# Altium PCB SensorFusion.PcbDoc (part 1 of 2)
Units mil, origin at the board's own origin, x right, y up, seen from the top; angles counter-clockwise.
Board outline 6000 x 4000 mil, 4 copper layers (Component Side, Ground Plane, Power Plane, Solder Side), stack 33.234 mil thick; 136 components, 116 nets, 500 pads, 751 vias.
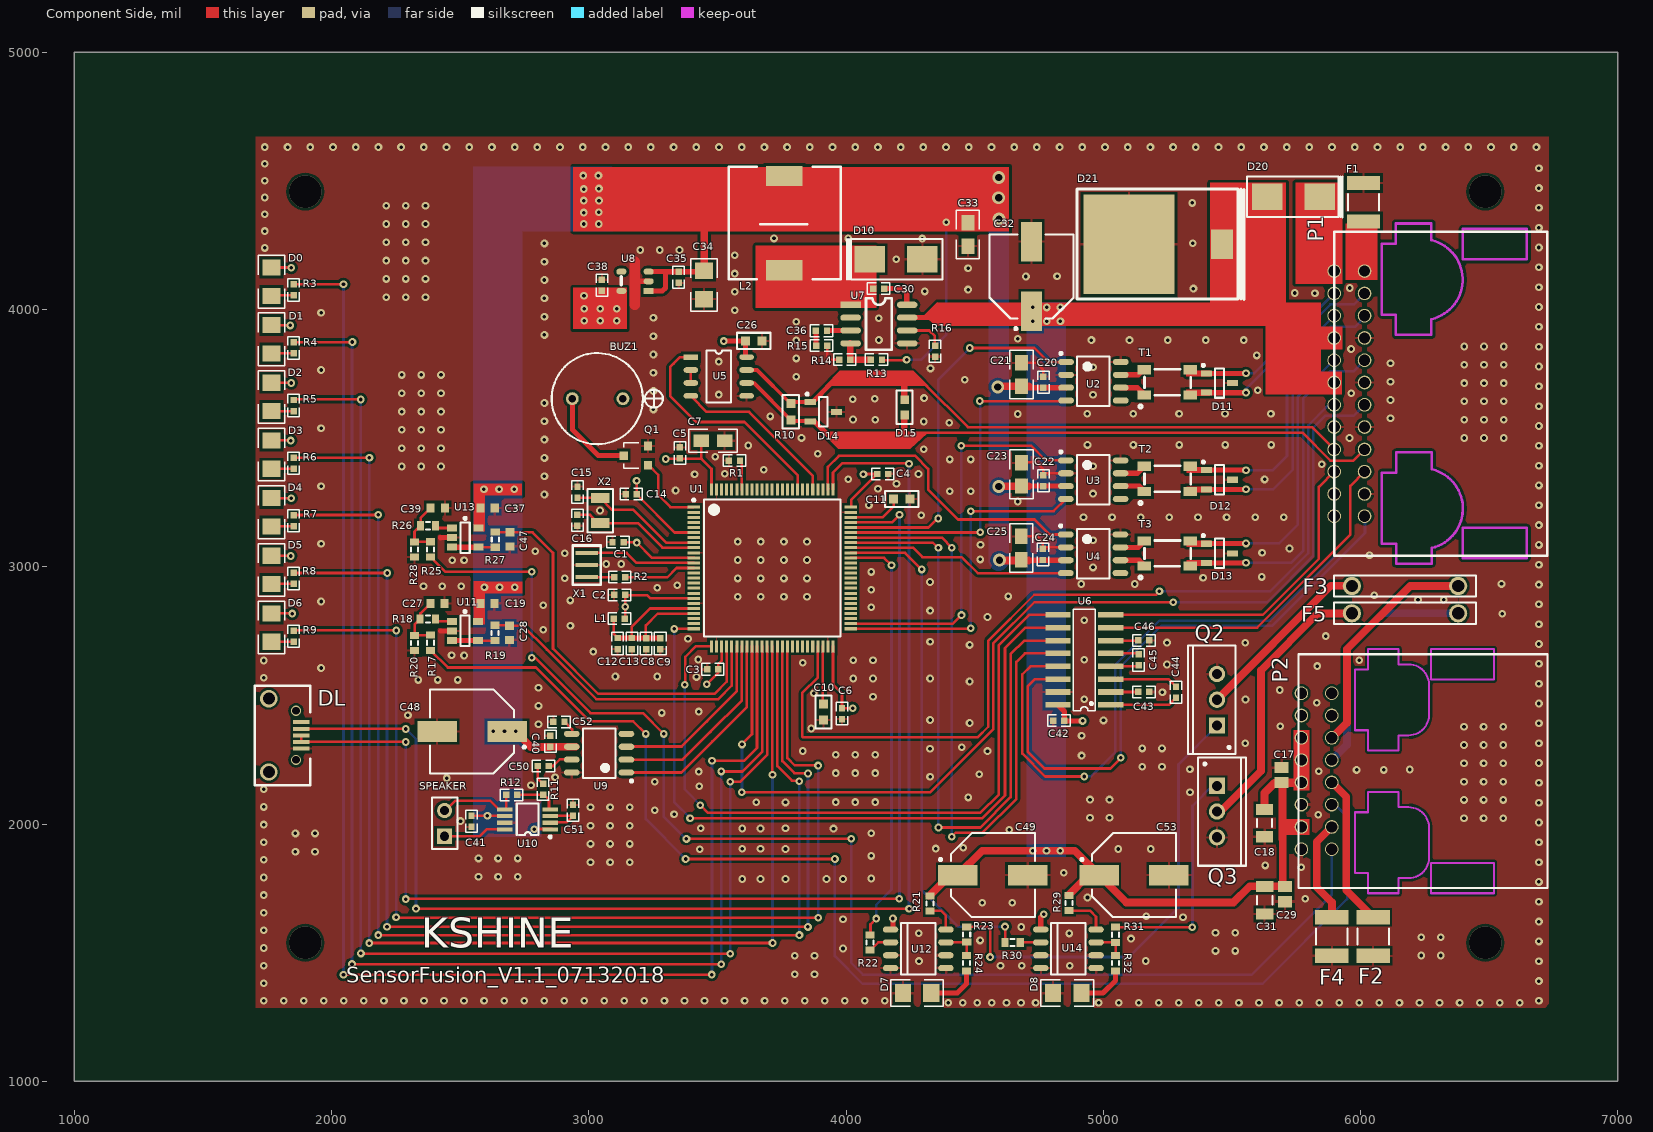
[diagram p0: Component Side view]
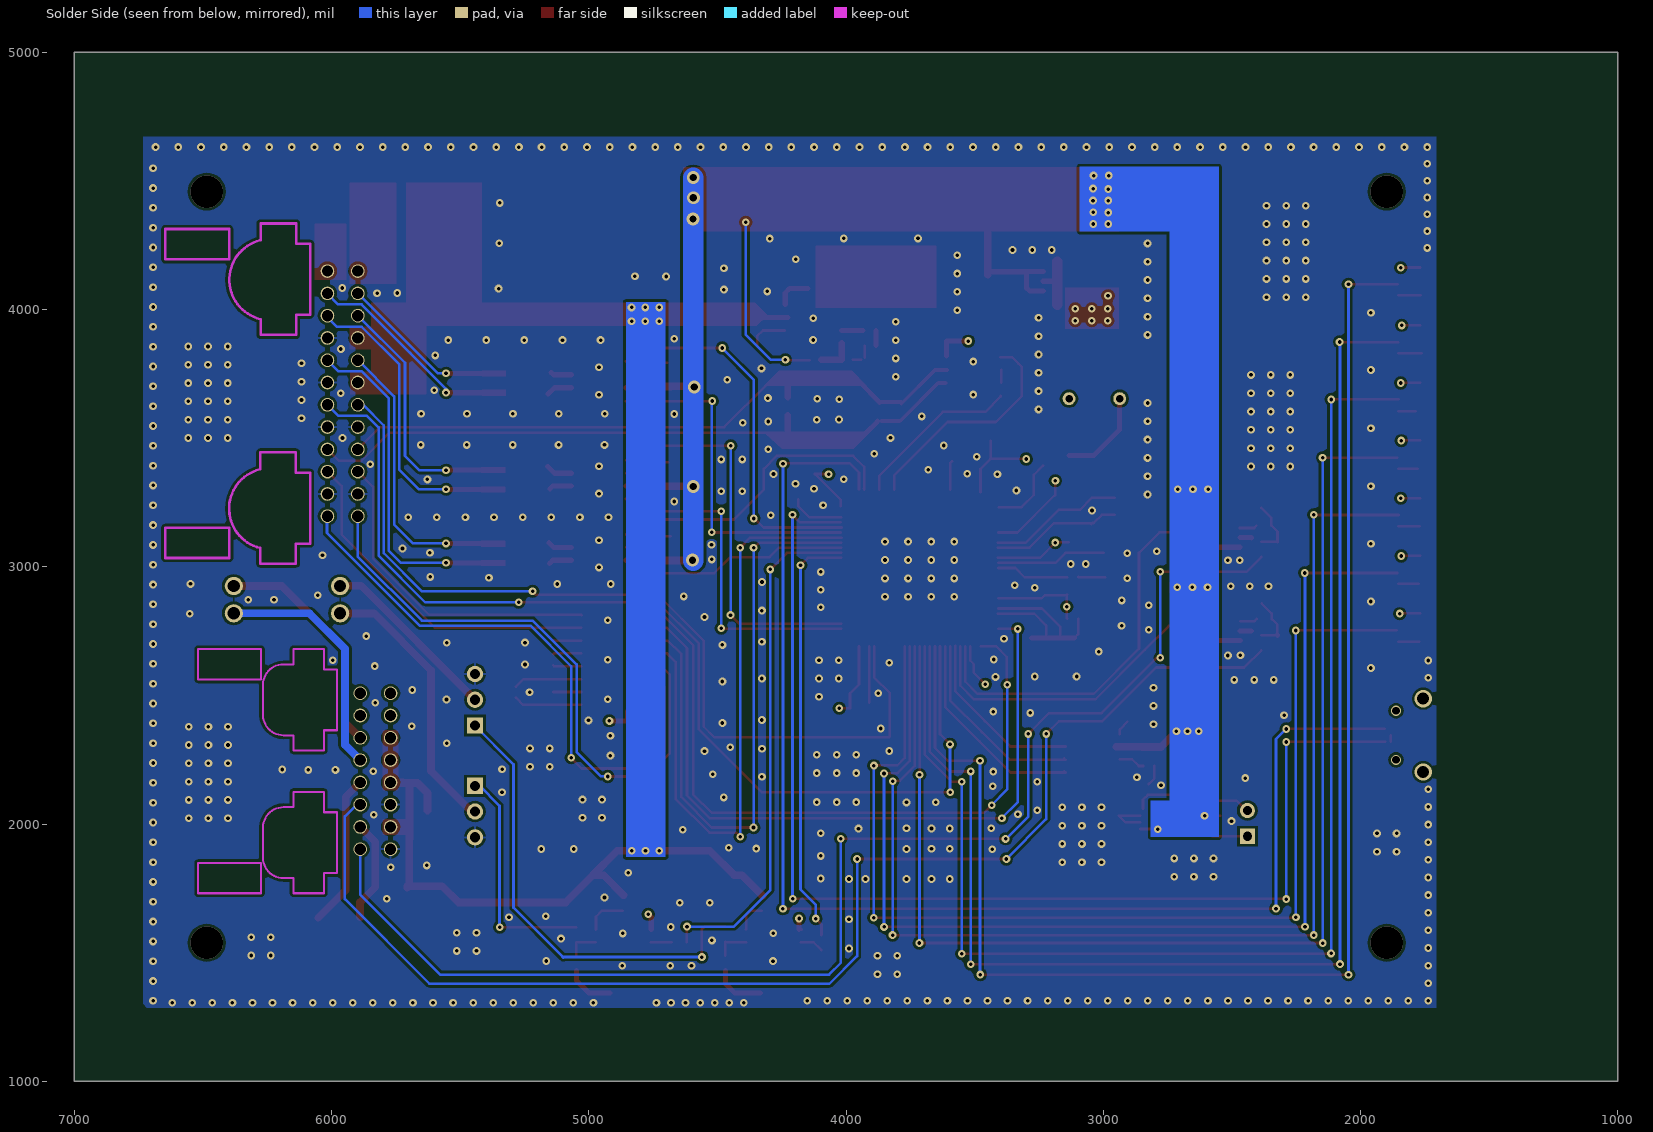
[diagram p1: Solder Side view, seen from below]
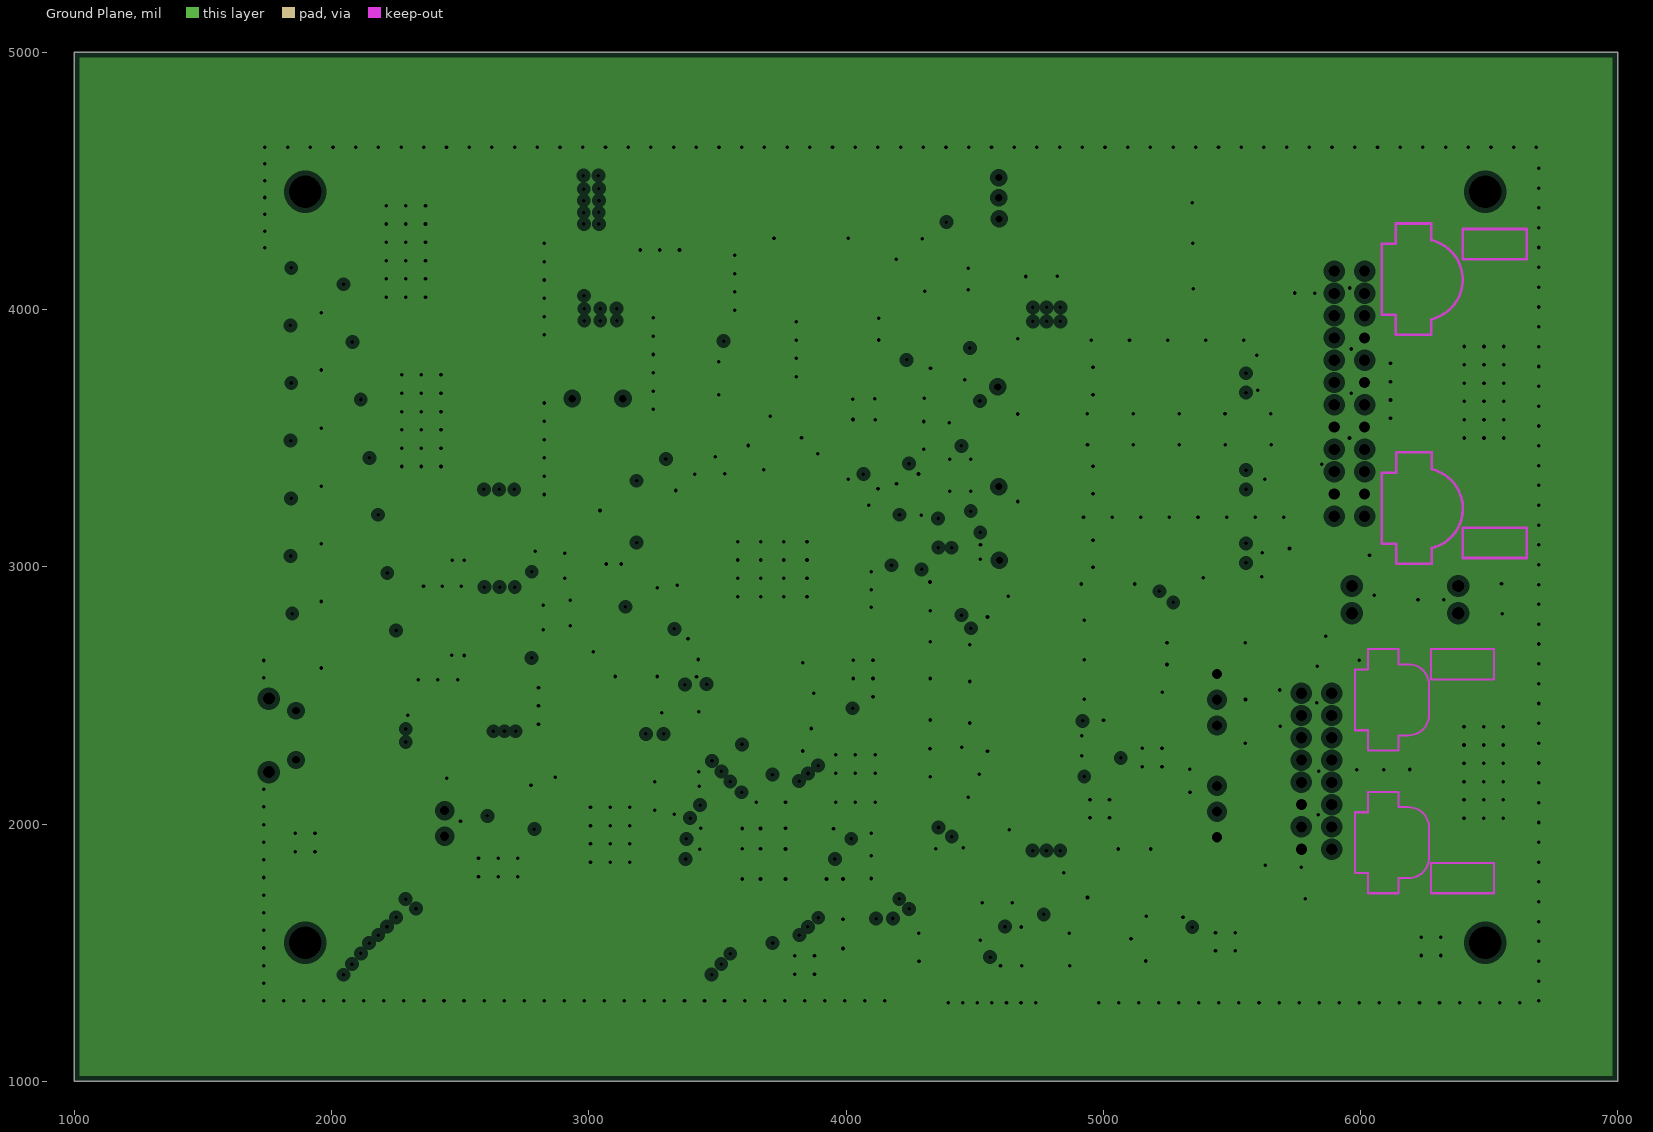
[diagram p2: Ground Plane, clearances drawn from the general rule]
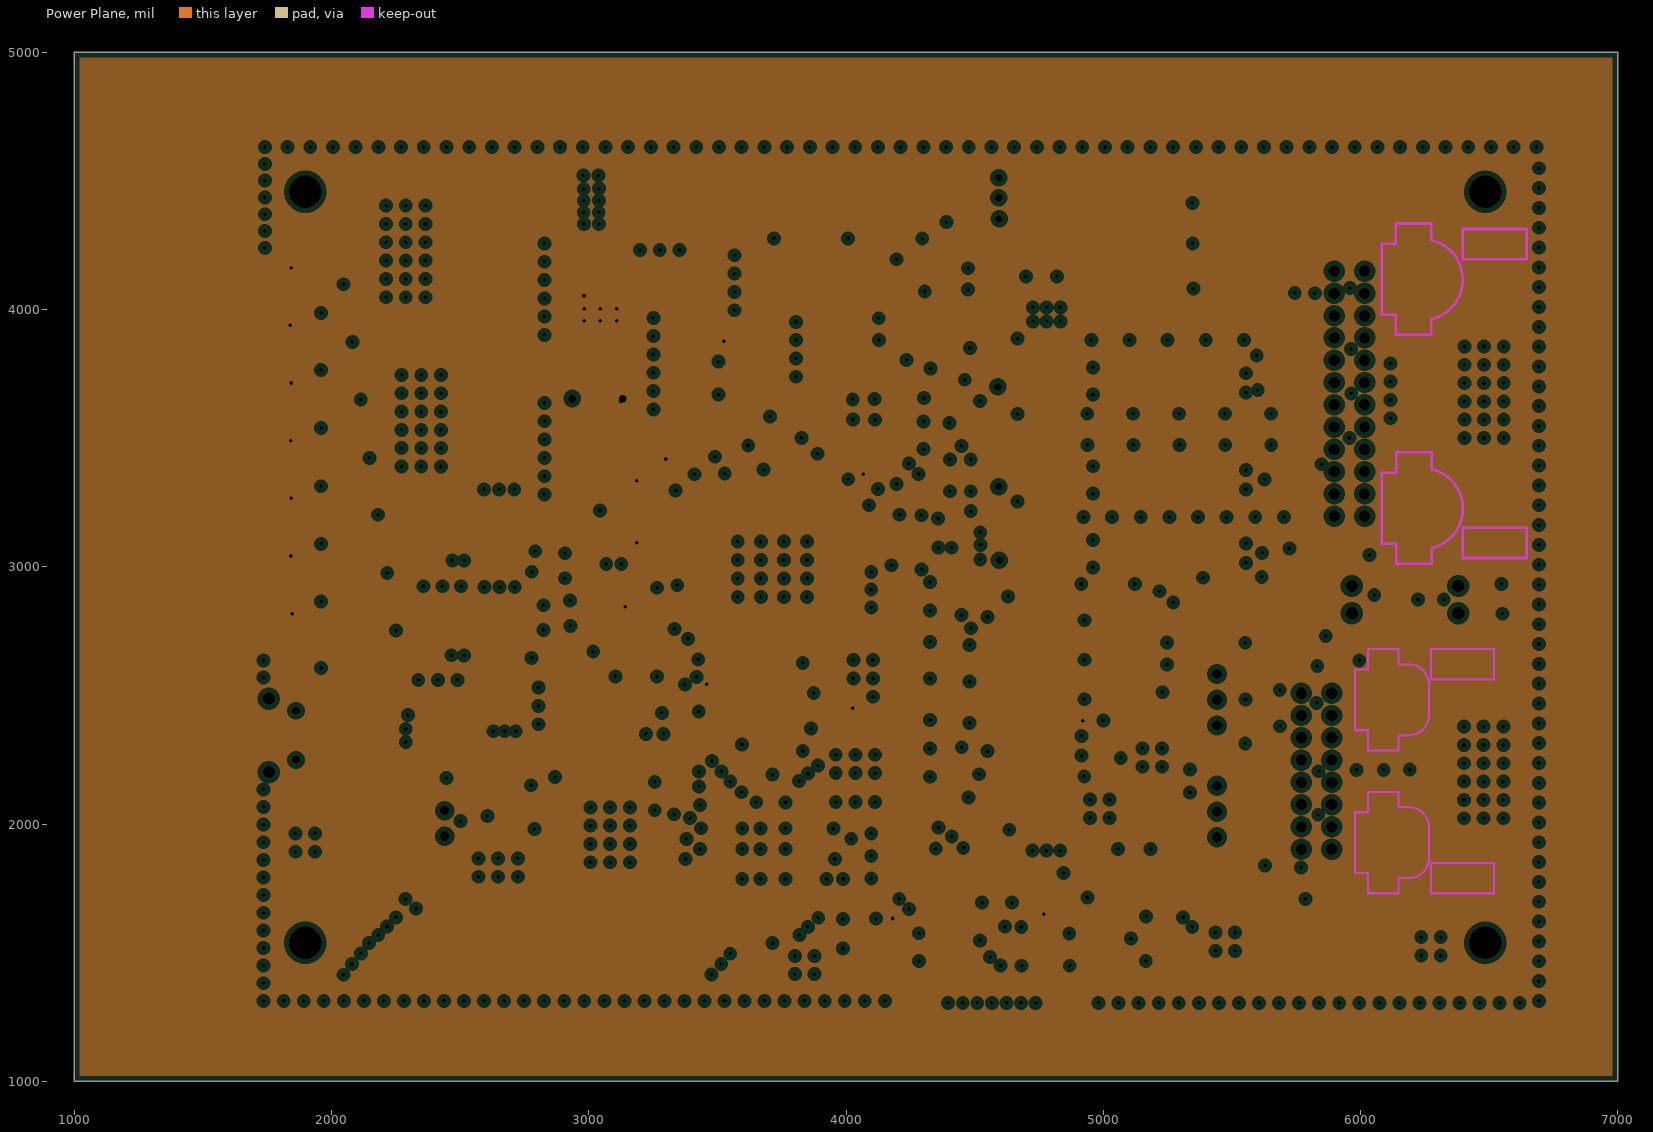
[diagram p3: Power Plane, clearances drawn from the general rule]

## Layer stack, top to bottom
Top Solder: solder mask 0.4, Solder Resist, Dk 3.5
Component Side: signal copper 1.4
Dielectric 1: core 12.6, FR-4, Dk 4.8
Ground Plane: plane copper 1.417, net GND
Dielectric 3: prepreg 5, Dk 4.2
Power Plane: plane copper 1.417, net D3V3
Dielectric 4: core 10, Dk 4.2
Solder Side: signal copper 1.4
Bottom Solder: solder mask 0.4, Solder Resist, Dk 3.5

## Board outline
1000,1000 7000,1000 7000,5000 1000,5000

## Design rules (kind name [scope] priority, off if disabled: settings)
Clearance [All] p1: gap=3
ComponentClearance [All] p1: gap=0 collisioncheckmode=3 verticalgap=0 showdistances=FALSE
HoleSize [All] p1 off: absolutevalues=TRUE maxlimit=100 minlimit=1 maxpercent=80.000 minpercent=20.000
PlaneClearance [All] p1: clearance=20
PlaneConnect [All] p1: planeconnectstyle=Direct reliefexpansion=20 reliefentries=4 reliefconductorwidth=10 reliefairgap=10
PolygonConnect PolygonConnect_1 [IsVia] p1: connectstyle=Direct reliefconductorwidth=10 reliefentries=4 polygonreliefangle="90 Angle" airgapwidth=10
PolygonConnect [All] p2: connectstyle=Relief reliefconductorwidth=10 reliefentries=4 polygonreliefangle="90 Angle" airgapwidth=10
RoutingVias [All] p1: holewidth=28 width=50 viastyle="Through Hole" minholewidth=28 minwidth=50 maxholewidth=28 maxwidth=50
SilkToSilkClearance [All] p1: silktosilkclearance=0
SilkToSolderMaskClearance [IsPad] p1: minsilkscreentomaskgap=0 clearancetoexposedcopper=TRUE
SolderMaskExpansion [All] p1: expansion=4
Width [All] p1: maxlimit=100 minlimit=10 preferedwidth=10
24 further rules are at their usual default settings.

## Classes and differential pairs
component class "AEBS component_Rear": C29 C31 C37 C39 C47 C53 D8 F4 F5 Q3 R25 R26 R27 R28 R29 R30 R31 R32 U13 U14
component class "AEBS component_Front": C17 C18 C19 C27 C28 C49 D7 F2 F3 Q2 R17 R18 R19 R20 R21 R22 R23 R24 U11 U12
component class Power: C30 C32 C33 C34 C35 C36 C38 D10 L2 R13 R14 R15 R16 U7 U8
component class MCU: C1 C2 C3 C4 C5 C6 C7 C8 C9 C10 C11 C12 C13 C14 C15 C16 D0 D1 D2 D3 D4 D5 D6 DL L1 R1 R2 R3 R4 R5 R6 R7 R8 R9 U1 X1 X2
component class Interface: BUZ1 C20 C21 C22 C23 C24 C25 C26 C40 C41 C42 C43 C44 C45 C46 C48 C50 C51 C52 D11 D12 D13 D14 D15 D20 D21 F1 P1 P2 Q1 R10 R11 R12 SPEAKER T1 T2 T3 U2 U3 U4 U5 U6 U9 U10

## Components (designator, comment, footprint, x,y, rotation, side; value= is the part's Value field where it differs from the comment)
BUZ1 "BUZZER" BUZ0905 3035.03,3653.39 r0 top
C1 "100nF" 0402 3220.22,3100.1 r270 top
C2 "100nF" 0402 3226.32,2894.46 r270 top
C3 "100nF" 0402 3588.17,2605.48 r270 top
C4 "100nF" 0402 4036.27,3356.6 r90 top
C5 "100nF" 0402 3357.84,3336.18 r180 top
C6 "100nF" 0402 3980.4,2535.41 r0 top
C7 "10uF" 0805 3438.02,3489.92 r0 top
C8 "100nF" 0402 3218.74,2807.58 r0 top
C9 "1uF" 0402 3274.03,2807.58 r0 top
C10 "2.2uF" 0603 3907.97,2496.35 r0 top
C11 "2.2uF" 0603 4155.39,3258.86 r90 top
C12 "100nF" 0402 3116.04,2594.98 r180 top
C13 "1uF" 0402 3171.32,2594.98 r180 top
C14 "100nF" 0402 3058.73,3278.39 r90 top
C15 "9pF/12.5pF" 0402 2952.12,3396.55 r0 top
C16 "9pF/12.5pF" 0402 2959.43,3074.45 r180 top
C17 "Cap Pol3" C0805 5692.65,2190.71 r90 top
C18 "Cap Semi" C1206 5626.78,2003.55 r270 top
C19 "Cap Semi" 1608[0603] 2605.98,2856.88 r180 top
C20 "100nF" 0402 4771.35,3611.1 r180 top
C21 "22uF" 0805 4682.17,3702.36 r90 top
C22 "100nF" 0402 4771.21,3228.43 r180 top
C23 "22uF" 0805 4682.08,3314.1 r90 top
C24 "100nF" 0402 4769.42,2941.44 r180 top
C25 "22uF" 0805 4681.23,3027.86 r90 top
C26 "100nF" 0603 3580.18,3873.96 r90 top
C27 "Cap Semi" 1608[0603] 2411.92,2857.36 r180 top
C28 "Cap Semi" 1608[0603] 2692.57,2742.98 r90 top
C29 "Cap Pol3" C0805 5706.58,1727.19 r270 top
C30 "100nF" 0402 4020.44,4077.33 r90 top
C31 "Cap Semi" C1206 5627.71,1703.52 r270 top
C32 "47uF" cap_pol_8*10.2 4721.18,4128.11 r90 top
C33 "22uF" 0805 4473.86,4336.79 r270 top
C34 "22uF" 1206#1 3448.21,4040.31 r90 top
C35 "100nF" 0402 3345.75,4231.76 r0 top
C36 "150pF" 0402 3798.24,3913.61 r90 top
C37 "Cap Semi" 1608[0603] 2606.98,3228.8 r180 top
C38 "100nF" 0402 3054.8,3987.82 r180 top
C39 "Cap Semi" 1608[0603] 2412.92,3228.39 r180 top
C40 "100nF" 0402 2854.5,2215.07 r180 top
C41 "100nF" 0402 2540.27,2116.6 r0 top
C42 "100nF" 0402 4933.8,2405.8 r270 top
C43 "100nF" 0402 5264.68,2517.35 r270 top
C44 "100nF" 0402 5286.75,2405.99 r180 top
C45 "100nF" 0402 5141.46,2531.6 r180 top
C46 "100nF" 0402 5264.68,2717.97 r270 top
C47 "Cap Semi" 1608[0603] 2693.57,3106.51 r90 top
C48 "220uF" cap_pol_8*10.2 2546.82,2359.69 r180 top
C49 "Cap Pol1" Cap_pol_8*10.2 4562.62,1799.32 r90 top
C50 "1uF" 0402 2930.18,2229.37 r270 top
C51 "1uF" 0402 2934.64,2159.58 r0 top
C52 "10nF" 0402 2777.66,2393.44 r90 top
C53 "Cap Pol3" Cap_pol_8*10.2 5111.61,1799.32 r90 top
D0 "LED" 1206#1 1766.9,4163.39 r270 top
D1 "LED" 1206#1 1766.9,3939.3 r270 top
D2 "LED" 1206#1 1766.9,3715.22 r270 top
D3 "LED" 1206#1 1766.9,3491.13 r270 top
D4 "LED" 1206#1 1766.9,3267.04 r270 top
D5 "LED" 1206#1 1766.9,3042.95 r270 top
D6 "LED" 1206#1 1766.9,2818.86 r270 top
D7 "LED3" 1206#2 4278.49,1342.56 r270 top
D8 "LED3" 1206#2 4861.81,1342.81 r270 top
D10 "B290-13-F" B290 4296.86,4195.49 r180 top
D11 "PESD2CAN" SOT23 5452.95,3712.1 r0 top
D12 "PESD2CAN" SOT23 5452.95,3336.21 r0 top
D13 "PESD2CAN" SOT23 5452.95,3049.94 r0 top
D14 "PSM712" SOT23 3913.21,3600.45 r0 top
D15 "PSD12C" SOD323 4227.83,3649.03 r270 top
D20 "VS-3EJH02HM3/6A" B290 5637.17,4438.13 r0 top
D21 "SM8S33" SM8S 5099.89,4253.78 r0 top
DL "USB_5pin" USBmicro_B 1776.86,2335.04 r90 top
F1 "mSMD260-8V  2.6A" 1812 6011.67,4416.79 r90 top
F2 "mSMD260-8V  2.6A" 1812 6049.35,1562.42 r270 top
F3 "JK30-500" JK30-500 6173.15,2925.22 r0 top
F4 "mSMD260-8V  2.6A" 1812 5888.94,1562.7 r270 top
F5 "JK30-500" JK30-500 6173.15,2819.04 r0 top
L1 "BLM15BD221SN1D" 0402 3225.45,2801.98 r270 top
L2 "15uH" 10*10Inductor 3760.77,4518.81 r180 top
P1 "DJ7246S_2x12" DJ7246S_2*12 5899.78,3040.36 r90 top
P2 "DJ7166S 2*8" DJ7161S_0.7_10AW 6726.95,1750.43 r90 top
Q1 "2N7002" 2N7002 3184.07,3430.42 r90 top
Q2 "IRF540N" TO-220AB 5442.18,2483.07 r90 top
Q3 "IRF540N" TO-220AB 5442.14,2048.33 r270 top
R1 "10K" 0402 3459.95,3408.93 r90 top
R2 "0R" 0402 3226.49,2963.94 r270 top
R3 "510R" 0402 1856.46,3969.84 r180 top
R4 "510R" 0402 1856.46,3744.23 r180 top
R5 "510R" 0402 1856.46,3520.38 r180 top
R6 "510R" 0402 1856.46,3295.81 r180 top
R7 "510R" 0402 1856.46,3072.4 r180 top
R8 "510R" 0402 1856.46,2848.32 r180 top
R9 "510R" 0402 1856.46,2623.38 r180 top
R10 "NULL" 0603 3789.54,3541.13 r180 top
R11 "10K" 0402 2826.28,2029.08 r180 top
R12 "20K" 0402 2593.65,2109.47 r90 top
R13 "205K" 0402 4224.84,3809.33 r270 top
R14 "40.2K" 0402 4101.19,3809.52 r270 top
R15 "100k" 0402 3798.74,3855.57 r90 top
R16 "200K" 0402 4342.5,3944.54 r0 top
R17 "Res3" J1-0603 2385.33,2704.63 r90 top
R18 "Res3" J1-0603 2374.24,2796.87 r0 top
R19 "Res3" J1-0603 2635.63,2742.98 r90 top
R20 "Res3" J1-0603 2323,2704 r90 top
R21 "Res3" J1-0603 4326.66,1690.79 r90 top
R22 "Res3" J1-0603 4094.05,1539.45 r270 top
R23 "Res3" J1-0603 4469.22,1570.36 r90 top
R24 "Res3" J1-0603 4468.59,1458.85 r90 top
R25 "Res3" J1-0603 2385.33,3067.84 r90 top
R26 "Res3" J1-0603 2375.24,3159.57 r0 top
R27 "Res3" J1-0603 2636.63,3105.43 r90 top
R28 "Res3" J1-0603 2323,3067 r90 top
R29 "Res3" J1-0603 4867.09,1692.54 r90 top
R30 "Res3" J1-0603 4648,1539.57 r0 top
R31 "Res3" J1-0603 5048.34,1569.36 r90 top
R32 "Res3" J1-0603 5048.34,1458.85 r90 top
SPEAKER "XH2.54-2PIN" HDR1X2 2439.7,1952.22 r90 top
T1 "ACT45B-510-2P" ACT45B-510-2P 5225.27,3733.09 r0 top
T2 "ACT45B-510-2P" ACT45B-510-2P 5225.27,3357.81 r0 top
T3 "ACT45B-510-2P" ACT45B-510-2P 5225.27,3067.98 r0 top
U1 "STM32F413VGT6" STM-LQFP100_V 3713.19,2995.3 r0 top
U2 "TJA1050T" SO8 4954.28,3732.69 r0 top
U3 "TJA1050T" SO8 4953.62,3349.91 r0 top
U4 "TJA1050T" SO8 4953.12,3061.88 r0 top
U5 "SP3485" SO-8N 3397.19,3815.27 r0 top
U6 "MAX3232" SO16 5028.61,2463.05 r180 top
U7 "MP2565DN" so-8 4017.88,4018.53 r0 top
U8 "RT9013-33GB" SOT-23-5 3185.63,4111.52 r90 top
U9 "WTN6040" SO8 3047.77,2263.76 r180 top
U10 "LM4890" MSOP8 2850.08,1979.31 r90 top
U11 "LM321" LM321 2518.57,2750.6 r0 top
U12 "MOCD217M" MOCD217M 4280.83,1514.74 r0 top
U13 "LM321" LM321 2519.57,3113.35 r0 top
U14 "MOCD217M" MOCD217M 4864.74,1514.74 r0 top
X1 "8M smd" 8Mhz_XTAL 2992.46,2959.7 r90 top
X2 "FC135_32.768K" FC135 3044.39,3169.59 r90 top

## Footprints (in the part's own frame and the unit in brackets; to place one, negate y for a bottom-side part, rotate by r counter-clockwise, add the part's x,y. Pads: shape width x height; smd on the part's side, far side on the other; paste and mask are expansions set on the pad)
2N7002 [mm]
  rect 0.85x0.8 smd: 1(0.047,1.221) 2(-0.903,-1.179) 3(0.997,-1.179)
  silkscreen extent -1.23,-0.28 1.32,1.22
8Mhz_XTAL [mm]
  rect 0.4x2.2 smd: 1(0,0) 2(1.2,0) 3(2.4,0)
  silkscreen extent -0.75,-1.39 3.13,1.4
10*10Inductor [mm]
  rect 3.6x2 smd: 1(0,0) 2(0,9.3)
  silkscreen extent -5.55,-0.92 5.49,10.19
0402 [mil]
  rect 25x25 smd: 1(3.98,-127.99) 2(3.98,-84.98)
  silkscreen extent -19,-150 26,-63
0603 [mil]
  rect 35x35 smd: 1(4.25,-92.76) 2(4.25,-29.76)
  silkscreen extent -27,-126 36,4
0805 [mil]
  rect 60x50 smd: 1(90,0) 2(0,0)
  silkscreen extent -50,-45 140,45
1206#1 [mm]
  rect 1.6x1.8 smd: 1(0,0) 2(2.8,0)
  silkscreen extent -1.2,-1.3 4,1.3
1206#2 [mm]
  rect 1.8x1.6 smd: 1(-0.006,1.352) 2(-0.006,-1.448)
  silkscreen extent -1.31,-2.65 1.29,2.55
1608[0603] [mm] "Chip Capacitor, Body 1.6x0.8mm, IPC High Density"
  rect 0.8x0.9 smd: 1(-0.7,0) 2(0.7,0)
  body extent -0.87,-0.48 0.87,0.48, height 1.3
1812 [mm] "Chip Capacitor, Body 4.5x3.2mm, IPC High Density"
  rect 1.4x3.3 smd: 1(-1.9,0) 2(1.9,0)
  silkscreen extent -0.8,-1.55 0.8,1.55, body extent -2.4,-1.7 2.4,1.7, height 1.4
ACT45B-510-2P [mm]
  rect 1.35x0.9 smd: 1(-1.667,-1.669) 2(2.883,-1.669) 3(-1.667,0.831) 4(2.883,0.831)
  silkscreen extent -2.2,-2.96 2.91,0.87
B290 [mm]
  rect 3x2.6 smd: 1(0,0) 2(5.2,0)
  silkscreen extent -2,-2.02 7.42,2
BUZ0905 [mm] "Buzzer"
  round 1.27 hole 0.75: 1(2.485,0.002) 2(-2.515,0.002)
  silkscreen extent -4.54,-4.5 6.43,4.5
C0805 [mm] "Chip Capacitor, Body 2.0x1.3mm, IPC High Density"
  rect 1.1x1.4 smd: 1(-0.75,0) 2(0.75,0)
  body extent -1.1,-0.72 1.1,0.72, height 1.4
C1206 [mm] "Chip Capacitor, Body 3.2x1.6mm, IPC High Density"
  rect 1.1x1.7 smd: 1(-1.35,0) 2(1.35,0)
  silkscreen extent -0.4,-0.75 0.4,0.75, body extent -1.7,-0.9 1.7,0.9, height 1.3
cap_pol_8*10.2 [mm]
  rect 3.9x2.05 smd: 1(-3.443,-0.001) 2(3.457,-0.001)
  silkscreen extent -5.27,-4.15 4.16,4.15
Cap_pol_8*10.2 [mm]
  rect 2.05x3.9 smd: 1(0.041,3.246) 2(0.041,-3.654)
  silkscreen extent -4.11,-4.35 4.19,5.07
DJ7161S_0.7_10AW [mm]
  round 1.35 hole 1.1: 1(19.25,24.3) 2(17.05,24.3) 3(14.85,24.3) 4(12.65,24.3) 5(10.45,24.3) 6(8.25,24.3) 7(6.05,24.3) 8(3.85,24.3) 9(3.85,21.3) 10(6.05,21.3) 11(8.25,21.3) 12(10.45,21.3) 13(12.65,21.3) 14(14.85,21.3) 15(17.05,21.3) 16(19.25,21.3)
  Keep-Out Layer lines w0.2: 13.597,17.7 15.597,17.7 15.597,19 21.597,19 21.597,17.7 23.597,17.7 ; 13.6,17.7 13.6,14.7 ; 23.6,17.7 23.6,14.7 ; 13.597,14.7 15.097,14.7 15.097,13.7 ccw(c17.097,13.7) 17.097,11.7 20.097,11.7 ccw(c20.097,13.7) 22.097,13.7 22.097,14.7 23.597,14.7 ; 1.5,19 7.5,19 7.5,17.7 9.5,17.7 9.5,14.7 8,14.7 8,13.7 cw(c6,13.7) 6,11.7 3,11.7 cw(c3,13.7) 1,13.7 1,14.7 -0.5,14.7 -0.5,17.7 1.5,17.7 1.5,19 ; -0.5,11.5 -0.5,5.3 2.5,5.3 2.5,11.5 -0.5,11.5 ; 20.6,11.5 20.6,5.3 23.6,5.3 23.6,11.5 20.6,11.5
  silkscreen extent 0,0 23.1,24.6
DJ7246S_2*12 [mm]
  round 1.35 hole 1.1: 1(3.968,0.049) 2(6.168,0.049) 3(8.368,0.049) 4(10.568,0.049) 5(12.768,0.049) 6(14.968,0.049) 7(17.168,0.049) 8(19.368,0.049) 9(21.568,0.049) 10(23.768,0.049) 11(25.968,0.049) 12(28.168,0.049) 13(28.168,-2.951) 14(25.968,-2.951) 15(23.768,-2.951) 16(21.568,-2.951) 17(19.368,-2.951) 18(17.168,-2.951) 19(14.968,-2.951) 20(12.768,-2.951) 21(10.568,-2.951) 22(8.368,-2.951) 23(6.168,-2.951) 24(3.968,-2.951)
  Keep-Out Layer lines w0.254: 23.415,-9.55 21.873,-9.55 21.873,-6.05 23.873,-6.05 23.873,-4.65 30.873,-4.65 30.873,-6.05 32.873,-6.05 32.873,-9.55 31.241,-9.555 ; 0.717,-9.566 -0.733,-9.566 -0.733,-6.066 1.267,-6.066 1.267,-4.666 8.267,-4.666 8.267,-6.066 10.267,-6.066 10.267,-9.566 8.626,-9.566 ; 23.436,-9.587 ccw(c27.322,-8.642) 31.202,-9.617 ; 0.83,-9.603 ccw(c4.716,-8.658) 8.596,-9.633 ; -0.162,-12.659 2.838,-12.659 2.838,-18.959 -0.162,-18.959 -0.162,-12.659 ; 29.326,-12.659 29.326,-18.959 32.326,-18.959 32.326,-12.659 29.326,-12.659
  silkscreen extent 0.07,-20.98 32.07,0.05
FC135 [mm]
  rect 1x1.8 smd: 1(0,0) 2(2.5,0)
  silkscreen extent -0.92,-1.25 3.38,1.25
HDR1X2 [mm] "Connector; Header; 2 Position"
  rect 1.5x1.5 hole 0.9: 1(0,0)
  round 1.5 hole 0.9: 2(2.54,0)
  silkscreen extent -1.27,-1.27 3.81,1.27
J1-0603 [mm] "Chip Resistor, Body 1.6x0.8mm, IPC High Density"
  rect 0.7x0.9 smd: 1(-0.75,0) 2(0.75,0)
  silkscreen extent -0.2,-0.35 0.2,0.35, body extent -0.85,-0.48 0.85,0.48, height 0.9
JK30-500 [mm]
  round 1.8 hole 1.2: 1(-5.25,0) 2(5.25,0)
  silkscreen extent -7,-1.05 7,1.05
LM321 [mm] "SOT23, 5-Leads, Body 2.92x2.84mm, Pitch 0.95mm, IPC Medium Density"
  rect 0.99x0.69 smd: 1(-1.295,0.95) 2(-1.295,0) 3(-1.295,-0.95) 4(1.295,-0.95) 5(1.295,0.95)
  silkscreen extent -0.45,-1.5 0.45,2.03, body extent -0.84,-1.49 0.83,1.5, height 1.22
MOCD217M [mm] "SOIC, 8-Leads, Body 4.88x3.91mm, Pitch 1.27mm, IPC Medium Density"
  oval 1.52x0.61 smd: 1(-2.73,1.905) 2(-2.73,0.635) 3(-2.73,-0.635) 4(-2.73,-1.905) 5(2.73,-1.905) 6(2.73,-0.635) 7(2.73,0.635) 8(2.73,1.905)
  silkscreen extent -1.7,-2.55 1.7,2.55
MSOP8 [mm]
  rect 0.4x1.55 smd: 1(0,0) 2(0.65,0) 3(1.3,0) 4(1.95,0) 5(1.95,4.5) 6(1.3,4.5) 7(0.65,4.5) 8(0,4.5)
  silkscreen extent -0.87,-0.13 2.54,3.3
SM8S [mm]
  rect 9x9.8 smd: 1(0,0)
  rect 2.2x2.9 smd: 2(9.2,0)
  silkscreen extent -5.14,-5.44 11.35,5.44
SO8 [mm]
  oval 1.55x0.6 smd: 1(-2.508,1.613) 2(-2.508,0.343) 3(-2.508,-0.927) 4(-2.508,-2.197) 5(2.892,-2.197) 6(2.892,-0.927) 7(2.892,0.343) 8(2.892,1.613)
  silkscreen extent -3.13,-2.74 1.79,2.58
SO16 [mm]
  rect 2.5x0.55 smd: 1(0,0) 2(0,-1.27) 3(0,-2.54) 4(0,-3.81) 5(0,-5.08) 6(0,-6.35) 7(0,-7.62) 8(0,-8.89) 9(5.2,-8.89) 10(5.2,-7.62) 11(5.2,-6.35) 12(5.2,-5.08) 13(5.2,-3.81) 14(5.2,-2.54) 15(5.2,-1.27) 16(5.2,0)
  silkscreen extent 1.5,-9.44 3.7,0.55
so-8 [mil]
  rect 80x24 smd: 1(0,0)
  oval 80x24 smd: 2(0,-50) 3(0,-100) 4(0,-150) 5(220,-150) 6(220,-100) 7(220,-50) 8(220,0)
  silkscreen extent 60,-175 160,25
SO-8N [mm]
  rect 1.44x0.55 smd: 1(0,0)
  oval 1.44x0.55 smd: 2(0,-1.28) 3(0,-2.56) 4(0,-3.84) 5(5.5,-3.84) 6(5.5,-2.56) 7(5.5,-1.28) 8(5.5,0)
  silkscreen extent 1.55,-4.48 3.95,0.64
SOD323 [mm]
  rect 0.85x0.85 smd: 1(0,0) 2(1.5,0)
  silkscreen extent -0.91,-0.8 2.39,0.8
SOT23 [mm]
  rect 1.1x0.6 smd: 1(-1.325,1.001) 2(-1.325,-0.899) 3(1.275,0.051)
  silkscreen extent -1.75,-1.4 0.4,1.93
SOT-23-5 [mm]
  rect 0.6x1 smd: 1(-0.995,-1.201)
  oval 0.6x1 smd: 2(-0.045,-1.201) 3(0.905,-1.201) 4(0.905,1.499) 5(-0.995,1.499)
  silkscreen extent -0.4,1.5 0.4,1.5, body extent -1.5,-1.3 1.4,1.5, height 1.2
STM-LQFP100_V [mm] "Thin QFP, 100-Leads, Body 14x14mm, Pitch 0.5mm, ST Recommended"
  rect 1.2x0.3 smd: 1(-7.75,6) 2(-7.75,5.5) 3(-7.75,5) 4(-7.75,4.5) 5(-7.75,4) 6(-7.75,3.5) 7(-7.75,3) 8(-7.75,2.5) 9(-7.75,2) 10(-7.75,1.5) 11(-7.75,1) 12(-7.75,0.5) 13(-7.75,0) 14(-7.75,-0.5) 15(-7.75,-1) 16(-7.75,-1.5) 17(-7.75,-2) 18(-7.75,-2.5) 19(-7.75,-3) 20(-7.75,-3.5) 21(-7.75,-4) 22(-7.75,-4.5) 23(-7.75,-5) 24(-7.75,-5.5) 25(-7.75,-6) 51(7.75,-6) 52(7.75,-5.5) 53(7.75,-5) 54(7.75,-4.5) 55(7.75,-4) 56(7.75,-3.5) 57(7.75,-3) 58(7.75,-2.5) 59(7.75,-2) 60(7.75,-1.5) 61(7.75,-1) 62(7.75,-0.5) 63(7.75,0) 64(7.75,0.5) 65(7.75,1) 66(7.75,1.5) 67(7.75,2) 68(7.75,2.5) 69(7.75,3) 70(7.75,3.5) 71(7.75,4) 72(7.75,4.5) 73(7.75,5) 74(7.75,5.5) 75(7.75,6)
  rect 0.3x1.2 smd: 26(-6,-7.75) 27(-5.5,-7.75) 28(-5,-7.75) 29(-4.5,-7.75) 30(-4,-7.75) 31(-3.5,-7.75) 32(-3,-7.75) 33(-2.5,-7.75) 34(-2,-7.75) 35(-1.5,-7.75) 36(-1,-7.75) 37(-0.5,-7.75) 38(0,-7.75) 39(0.5,-7.75) 40(1,-7.75) 41(1.5,-7.75) 42(2,-7.75) 43(2.5,-7.75) 44(3,-7.75) 45(3.5,-7.75) 46(4,-7.75) 47(4.5,-7.75) 48(5,-7.75) 49(5.5,-7.75) 50(6,-7.75) 76(6,7.75) 77(5.5,7.75) 78(5,7.75) 79(4.5,7.75) 80(4,7.75) 81(3.5,7.75) 82(3,7.75) 83(2.5,7.75) 84(2,7.75) 85(1.5,7.75) 86(1,7.75) 87(0.5,7.75) 88(0,7.75) 89(-0.5,7.75) 90(-1,7.75) 91(-1.5,7.75) 92(-2,7.75) 93(-2.5,7.75) 94(-3,7.75) 95(-3.5,7.75) 96(-4,7.75) 97(-4.5,7.75) 98(-5,7.75) 99(-5.5,7.75) 100(-6,7.75)
  silkscreen extent -7.87,-6.75 6.75,6.82, body extent -8,-8 8,8, height 1.6
TO-220AB [mm] "TO, Thru-Hole, Vertical, Heatsink Mounted; 3 In-Line Leads; Pitch 2.54 mm"
  rect 1.6x1.6 hole 1: 1(-2.54,0)
  round 1.6 hole 1: 2(0,0) 3(2.54,0)
  silkscreen extent -5.35,-1.85 5.35,2.85, body extent -5.4,-1.9 5.4,2.9, height 19.3
USBmicro_B [mm]
  rect 0.4x1.6 smd: 1(1.542,-2.679) 2(0.892,-2.679) 3(0.242,-2.679) 4(-0.408,-2.679) 5(-1.058,-2.679)
  silkscreen extent -4.67,-3.56 5.12,1.93

## Part data
BUZ1: "Buzzer"
C1 C2 C3 C4 C5 C6 C7 C8 C9 C10 C11 C12 C13 C14 C15 C16 C20 C21 C22 C23 C24 C25 C26 C30 C34 C36 C40 C41 C42 C43 C44 C45 C46 C50 C51 C52: library part Cap, "Capacitor"
C17 C29 C53: "Polarized Capacitor (Surface Mount)"
C18 C19 C27 C28 C31 C37 C39 C47: "Capacitor (Semiconductor SIM Model)"
C32 C48: library part "Cap Pol1", "Polarized Capacitor (Radial)"
C33: library part Cap, "Capacitor,50V"
C35: library part Cap, "Capacitor,100V"
C38: library part Cap, "Capacitor 3V3"
C49: "Polarized Capacitor (Radial)"
D0 D1 D2 D3 D4 D5 D6: library part LED0, "green LED"
D7 D8: "Typical BLUE SiC LED"
D10: library part Diode, "Default Diode"
D11 D12 D13 D14: library part PESD1CAN
D20 D21: library part "Diode 1N4007", "1 Amp General Purpose Rectifier"
F1 F2 F3 F4 F5: library part "Fuse 2", "Fuse"
L1: library part Inductor, "muRata ferrite bead"
L2: library part Inductor, "Inductor, 1A"
P1: library part DJ7246S-0.7-10AW
P2: library part DJ7166S
Q1: library part N-MOSFET
Q2 Q3: library part NMOS-2, "N-Channel Power MOSFET"
R1 R2 R3 R4 R5 R6 R7 R8 R9 R10 R11 R12 R13 R14 R15 R16: library part Res1, "Resistor"
R17 R18 R19 R20 R21 R22 R23 R24 R25 R26 R27 R28 R29 R30 R31 R32: "Resistor"
SPEAKER: library part "Header 2", "Header, 2-Pin"
T1 T2 T3: library part "Trans Eq", "Transformer (Equivalent Circuit Model)"
U1: library part CMP-1771-00004-1, "ARM Cortex-M4 32-Bit DSP+FPU, 1024 KB Flash, 82 I/Os, 100-Pin LQFP, -40 to 85 degC, Tray"
U2 U3 U4: "CAN Tranceiver"
U7: library part MP1584, "DCDC 4.5V~28V input 1.8V ~5V output low power"
U8: library part RT9193
X1: "muRata"
X2: library part XTAL_32.768k

## Via types
v1: diameter 30, hole 14, Component Side to Solder Side, tented both sides, 732 vias
v2: diameter 30, hole 14, Component Side to Solder Side, 5 vias
v3: diameter 125.98, hole 125.98, Component Side to Solder Side, 4 vias
v4: diameter 50, hole 28, Component Side to Solder Side, 3 vias
v5: diameter 50, hole 28, Component Side to Solder Side, tented both sides, 3 vias
v6: diameter 66.93, hole 47.24, Component Side to Solder Side, 2 vias
v7: diameter 39.37, hole 29.53, Component Side to Solder Side, 2 vias

## Nets (pads, with @x,y where several pads share a name; then routed paths per layer and width w, separated by ;. In a path a pad name is that pad's centre, name@x,y a point inside that pad or via, vN(x,y) a via of type N, cw(c..) or ccw(c..) an arc to the next point about the centre after c; other vN are vias at no path point)
5V: C19.2 C20.2 C21.2 C22.2 C23.2 C24.2 C25.2 C33.2 C34.2 C35.2 C37.2 C40.2 C41.2 C48.1 L2.1 R13.2 U2.3 U3.3 U4.3 U8.1 U8.3 U9.6 U10.1 U10.6 U11.5 U13.5 | length 4111.1
  Component Side w10: C41.2@2544.69,2031.62 U10.6@2696.16,2031.62 ; v1@2787.79,1980.44 U10.1@2856.33,1980.44 ; R13.2@4140.51,3803.41 v1@4235.2,3803.41
  Component Side w20: C37.2@2578.76,3228.89 C37.2@2579.41,3228.24 ; v1@2709.58,3301.08 v1@2709.87,3301.37 ; U8.3@3231.69,4147.22 3298.31,4147.22 3298.31,4083.88 3287.03,4072.59 U8.1@3232.24,4072.59 ; 3300.49,4147 C34.2@3448.18,4147 ; C21.2@4679.29,3696.19 U2.3@4855.54,3696.19 ; C23.2@4681.99,3313.41 U3.3@4854.89,3313.41 ; C25.2@4687.21,3025.38 U4.3@4854.39,3025.38
  Component Side w30: v2(2715.52,2360.55) 2715.52,2358.66 2774.58,2299.6 C40.2@2849.21,2299.6 ; C40.2@2850.52,2300.05 U9.6@2949.28,2300.05 ; C34.2@3449.08,4135.96 3449.08,4331.29 ; v4@4591.44,3024.65 4709.38,3024.65 ; v4@4592.3,3313.16 4710.23,3313.16 ; v4@4594.92,3701.42 4710.32,3701.42
  Solder Side w10: v1@4235.56,3805.53 v1(4235.56,3804.32) 4291.68,3804.3 ; 4291.35,3803.97 4390.42,3903.04 v1@4390.42,4340.86
  Solder Side w80: v4@4593.72,3023.14 v5(4593.72,4512.87)
  other v1: 2788.47,1979.88 2606.08,2031.66 2594.43,2920.65 2653.33,2920.65 2712.22,2920.65 2592.41,3301.08 2651.31,3301.08 2710.2,3301.08 2981.01,4332.42 3039.04,4332.42 4389.96,4339.72 2980.39,4376.87 3038.82,4377.77 2980.39,4423.62 3039.72,4423.62 2980.35,4468.22 3039.57,4470.19 2978.81,4520.71 3037.45,4520.71
  other v2: 2629.15,2360.55 2672.33,2360.55
  other v4: 4596.35,3025.63 4593.69,3311.77 4589.8,3699.22
  other v5: 4595.07,4352.08 4593.48,4434.31
24V: C17.1 C18.1 C29.1 C31.1 C32.1 C49.1 C53.1 D20.1 D21.2 P1.7 P1.9 P2.3 P2.4 P2.5 P2.7 R21.2 R29.2 U7.7 | length 2578.5
  Component Side w20: U7.7@4225.01,3968.45 4376.95,3968.45
  Component Side w30: R21.2@4324.53,1721.18 4404.28,1800.93 C49.1@4434.84,1800.93 ; C49.1@4434.99,1801.61 4529.86,1896.49 4889.12,1896.49 C53.1@4985.66,1799.95 ; R29.2@4864.88,1723.48 4942.32,1800.93 C53.1@4983.83,1800.93 5089.72,1695.04 5506.28,1695.04 5569.41,1758.17 C29.1@5699.77,1758.17 ; C18.1@5626.78,2052.42 5626.78,2120.57 5665.74,2159.53 5694.82,2159.53 5695.1,2159.25 5771.61,2159.25 5771.61,2161.78 P2.5@5769.59,2159.75 ; 5696.84,1940.85 C17.1@5696.84,2158.39 ; 5697.34,1960.94 5697.34,1760.6 C29.1@5699.77,1758.17 ; C29.1@5705.02,1758.76 5704.43,1758.17 C29.1@5699.77,1758.17 ; C29.1@5705.54,1752.4 C29.1@5699.77,1758.17 ; 5723.63,2161.22 P2.5@5770.31,2161.22
  other v1: 4725.63,1896.5 4779.26,1896.5 4832.88,1896.5 4779.91,3953.9 4833.54,3953.9 4779.91,4008.13 4833.54,4008.13
  other v2: 4726.29,3953.9 4726.29,4008.13
232_1_RX: P1.1 U6.13 | length 2420.5
  Component Side w10: U6.13@4823.88,2613.05 4716.61,2613.05 4685.65,2582.09 4685.65,2273.25 4774.11,2184.79 v1@4926.41,2184.79
  Solder Side w10: v1(4926.09,2184.84) 4951.64,2184.84 5046.98,2280.18 5046.98,2619.99 5217.93,2790.93 5649.06,2790.93 5898.49,3040.37 P1.1@5898.49,3197.78
232_1_TX: P1.24 U6.14 | length 2375
  Component Side w10: U6.14@4823.88,2563.05 4734.05,2563.05 4706,2535 4706,2281.18 4771.49,2215.69 5027.46,2215.69 v1@5068.68,2256.91
  Solder Side w10: v1(5068.02,2257.21) 5068.02,2612.75 5226.21,2770.93 5657.34,2770.93 6017.65,3131.24 P1.24@6017.65,3196.09
232_2_RX: P1.3 U6.8 | length 1268.1
  Component Side w10: U6.8@5027.89,2811.72 5029.45,2813.29 5620.14,2813.29 5837.99,3031.14 5837.99,3310.97 P1.3@5899.71,3372.69
232_2_TX: P1.22 U6.7 | length 1348.3
  Component Side w10: U6.7@5029.67,2762.88 5598.01,2762.88 5960.65,3125.52 5960.65,3313.91 P1.22@6016.32,3369.57
A3V3: C8.2 C9.2 C12.1 C13.1 L1.1 U1.21 U1.22 | length 821.3
  Component Side w10: L1.1@3097.46,2798.01 3097.46,2738.19 C12.1@3112.46,2723.18 ; C13.1@3167.29,2723.1 3167.29,2767 3238.1,2837.82 U1.21@3408.78,2837.82 ; C8.2@3221.63,2723.21 3221.63,2771.59 3268.18,2818.13 U1.22@3409.14,2818.13 ; C9.2@3278.01,2722.61 3280.81,2722.61 C9.2@3281.12,2722.3
  Component Side w20: C12.1@3112.06,2722.98 C13.1@3167.35,2722.98 C8.2@3223.85,2722.98 ; C8.2@3222.72,2722.61 C9.2@3278.01,2722.61
BUS_24V: D20.2 P1.12
CAN1_H: D11.1 P1.11 T1.4 | length 614.7
  Component Side w20: D11.1@5412.46,3751.39 v1@5554.85,3751.39
  Solder Side w10: v1(5554.85,3752.09) 5586.78,3752.09 5897.43,4062.73 P1.11@5898.52,4062.73
CAN1_L: D11.2 P1.14 T1.2 | length 775.4
  Component Side w20: D11.2@5410.62,3676.58 v1@5554.85,3676.58
  Solder Side w10: v1(5554.85,3677.17) 5554.85,3691.87 5694.48,3831.49 5882.73,4019.75 5974.24,4019.75 6016.35,4061.86 P1.14@6016.35,4063.61
CAN2_H: D12.1 P1.10 T2.4 | length 952
  Component Side w20: D12.1@5406.52,3375.7 v1(5554.85,3375.66)
  Solder Side w10: v1(5554.85,3375.66) 5659.49,3375.66 5714.48,3430.65 5714.48,3793.17 5894.36,3973.05 P1.10@5898.74,3973.05
CAN2_L: D12.2 P1.15 T2.2 | length 1127.7
  Component Side w20: D12.2@5412.3,3300.81 v1@5554.85,3300.81
  Solder Side w10: v1(5554.85,3300.92) 5660.25,3300.92 5736,3376.67 5736,3786.41 5882.49,3932.89 5978.12,3932.89 6016.92,3971.7 P1.15@6016.92,3976.87
CAN3_H: D13.1 P1.8 T3.4 | length 1085.7
  Component Side w20: D13.1@5398.99,3090.39 v1@5554.86,3090.39
  Solder Side w10: v1(5554.85,3090.77) 5682.77,3090.77 5757,3165 5757,3645.6 5756.85,3645.75 5756.85,3662.32 5897.49,3802.95 P1.8@5898.12,3802.95
CAN3_L: D13.2 P1.17 T3.2 | length 1293.7
  Component Side w20: D13.2@5396.31,3015.07 5463.16,3015.07 v1(5554.85,3015.12)
  Solder Side w10: v1(5554.85,3015.12) 5730.19,3015.12 5777,3061.94 5777,3653.94 ; 5776.85,3654.03 5882.1,3759.27 5973,3759.27 6016.15,3802.42 P1.17@6016.15,3803.3
D3V3: BUZ1.1 C1.2 C2.2 C3.2 C4.2 C5.2 C6.2 C7.2 C14.1 C26.2 C38.2 C42.2 D0.1 D1.1 D2.1 D3.1 D4.1 D5.1 D6.1 L1.2 U1.6 U1.11 U1.19 U1.28 U1.50 U1.75 U1.100 U5.8 U6.16 U8.5 U12.1 U14.1 | length 2966.8
  Component Side w10: D6.1@1766.9,2818.86 v1@1848.69,2818.86 ; D5.1@1766.9,3042.95 v1@1841.14,3042.95 ; D4.1@1766.9,3267.04 v1@1838.54,3267.04 ; D3.1@1766.9,3491.13 v1@1843.92,3491.13 ; D2.1@1766.9,3715.22 v1@1843.58,3715.22 ; D1.1@1766.9,3939.3 v1@1842.2,3939.3 ; D0.1@1766.9,4163.39 v1@1839.51,4163.39 ; C1.2@3135.15,3095.33 3185.24,3095.33 3245.9,3034.67 U1.11@3409.34,3034.67 ; L1.2@3139.88,2797.94 3142.11,2800.17 v1(3142.11,2844.37) 3142.11,2890.66 C2.2@3141,2891.77 ; C2.2@3142.25,2891.58 3143.8,2890.02 3226.97,2890.02 3239.81,2877.19 U1.19@3408.07,2877.19 U1.19@3408.42,2877.19 ; v1@3185.8,3334.93 3185.8,3278.62 3188.29,3276.13 3190.55,3276.13 3333.59,3133.09 U1.6@3408.07,3133.09 ; v1@3298.8,3419.78 3437.43,3419.78 ; 3437.41,3420.34 3438.02,3420.95 C7.2@3438.02,3489.92 ; 3438.76,3419.03 3477.04,3380.74 U1.100@3477.04,3288.93 ; v1@3459.73,2544.53 3503.03,2587.83 3503.03,2621.03 3516.34,2634.55 U1.28@3516.34,2690.18 ; U1.50@3949.41,2690.18 3949.41,2542.85 3984.33,2507.92 C6.2@3984.33,2449.42 ; C6.2@3984.38,2450.43 v1@4023.39,2450.43 ; U1.75@4020.6,3234.55 4020.6,3261.19 C4.2@4119.99,3360.58 ; v1@4067.4,3361.26 4068.08,3360.58 C4.2@4119.99,3360.58 ; C4.2@4120.16,3360.75 C4.2@4119.99,3360.58 ; C4.2@4121.24,3360.58 C4.2@4119.99,3360.58 ; U12.1@4173.08,1589.7 U12.1@4173.08,1590.07 ; U6.16@4823.52,2462.28 U6.16@4823.96,2462.72
  Component Side w20: v1@3524.96,3877.3 C26.2@3607.59,3877.3 ; U5.8@3609.94,3819.61 C26.2@3609.94,3878.21 ; U12.1@4182.31,1589.98 v1@4182.31,1632.98 ; U14.1@4757.22,1589.49 4757.22,1637.32 v1(4768.59,1648.69) ; U6.16@4822.76,2463.69 4823.64,2462.81 4823.85,2462.61 4849.23,2437.22 4849.23,2402.24 4850.8,2400.68 v1(4919.72,2400.68)
  other v1: 4182.45,1632.7 4025.7,2450.1 3458.22,2543.77 1847.14,2818.08 1841.07,3041.96 3186.1,3093.92 1842.96,3266.04 3185.8,3334.22 4067.81,3360.05 3299.73,3418.86 1841,3490.55 1843.45,3714.5 3524.3,3877.25 1839.94,3938.33 2982.28,3956.64 3044.67,3956.64 3108.59,3956.91 2982.28,4003.19 3044.67,4003.46 3108.45,4003.46 2981.39,4053.73 1843.44,4162